# Altium PCB PCB2.PcbDoc (part 2 of 2)
Units mil, origin at the board's own origin, x right, y up, seen from the top; angles counter-clockwise.
Board outline 4285 x 3645 mil, 4 copper layers (Top Layer, Int1 (GND), Int2 (PWR), Bottom Layer), stack 53.912 mil thick; 114 components, 93 nets, 393 pads, 69 vias.
Unrouted connection lines stored in the file: 1.
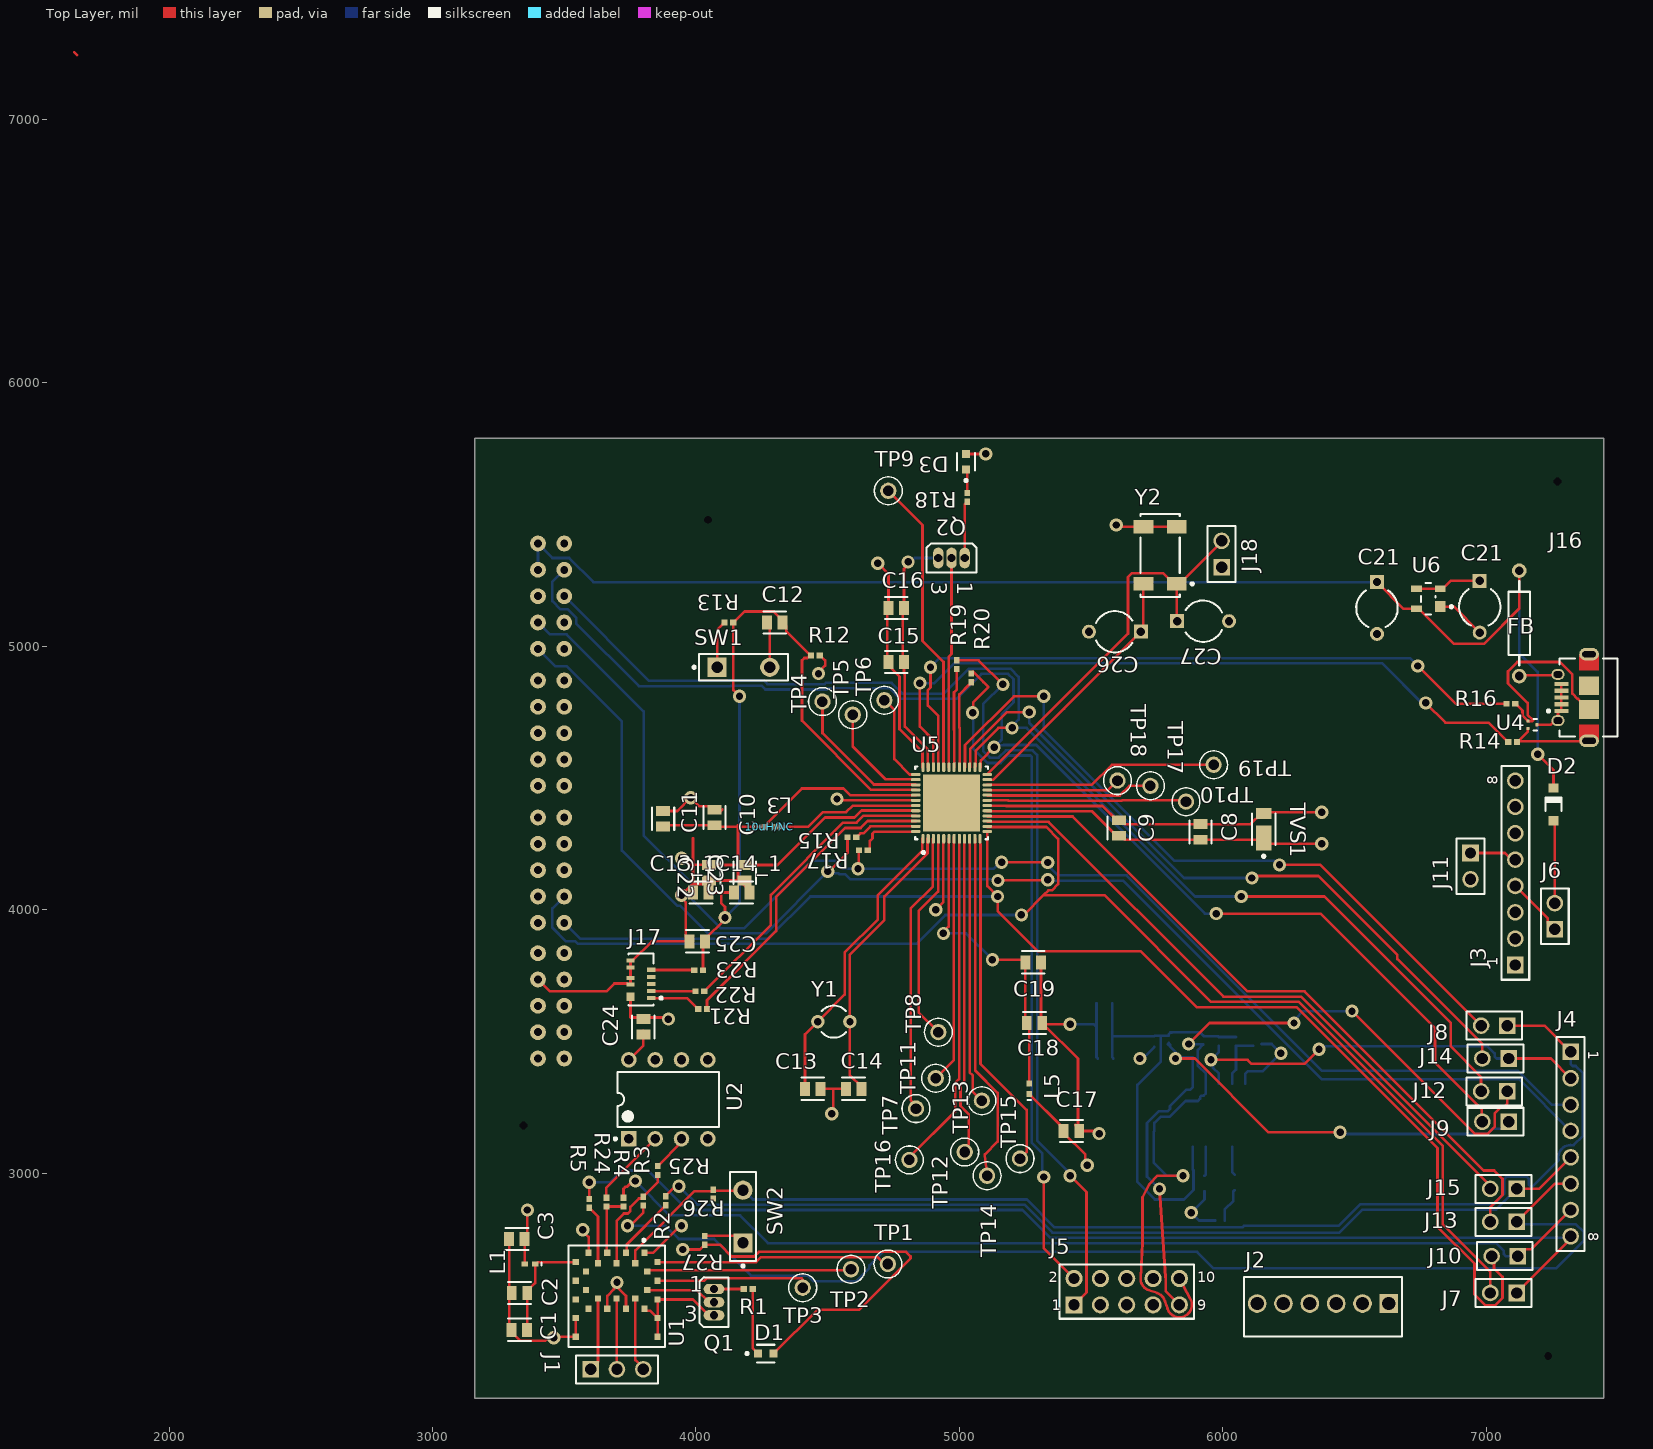
[diagram p0: Top Layer view]

## Via types
v1: diameter 50, hole 28, Top Layer to Bottom Layer, 69 vias

## Nets (pads, with @x,y where several pads share a name; then routed paths per layer and width w, separated by ;. In a path a pad name is that pad's centre, name@x,y a point inside that pad or via, vN(x,y) a via of type N, cw(c..) or ccw(c..) an arc to the next point about the centre after c; other vN are vias at no path point) (continued)
SCL: (continued)
  Top Layer w10: U5.26 5061.35,4543.59 5061.35,4602.92 5148.43,4690 v1(5200,4690) ; v1(6070,4050) 6385,4050 6865,3570 6865,3479.67 6980,3364.67 J12.2
  Bottom Layer w10: pad.19 3821.42,4868.58 4122.63,4868.58 4124.05,4870 4257.28,4870 4271.38,4855.91 4487.77,4855.91 4492.77,4860.91 4742.3,4860.91 4783.2,4820 4940.74,4820 5035.74,4915 5193.28,4915 5225,4883.28 5225,4721.57 5200,4696.57 v1(5200,4690) 5254.85,4690 5894.85,4050 6060,4050 v1@6070,4060
SDA: J9.2 pad.17 U5.25 | length 5033.8
  Top Layer w10: U5.25@5081.35,4540 5081.35,4566.35 v1(5131.72,4616.72) ; v1(5975,3985) 6370,3985 6805,3550 6805,3419.24 6982.75,3241.5 6982.75,3197.25 J9.2
  Bottom Layer w10: pad.17 3455,5245 3455,5171.36 3486.36,5140 3513.64,5140 3545,5108.64 3545,5086.72 3783.13,4848.58 4130.91,4848.58 4132.33,4850 4249,4850 4263.1,4835.91 4496.06,4835.91 4501.06,4840.91 4734.01,4840.91 4774.92,4800 4988.21,4800 5083.21,4895 5185,4895 5205,4875 5205,4786.2 5160,4741.2 5160,4645 v1@5139.37,4624.37 ; v1(5131.72,4616.72) v1@5139.37,4624.37 ; v1(5975,3985) 5931.57,3985 5291.57,4625 5168.28,4625 5167.65,4624.37 v1@5139.37,4624.37
SPICKS: U1.12
SPICS: U1.9
SPIMISO: R24.1 U2.2 | length 299.9
  Top Layer w10: R24.1 3660,2945 U2.2
SPIMOSI: R25.1 U2.3 | length 140.5
  Top Layer w10: R25.1 3855,3027.72 3945,3117.72 U2.3
SPISCK: U2.4
SWCLK: R22.1 U5.45 | length 1145.8
  Top Layer w10: R22.1 4032.72,3690 4038.54,3695.83 4038.54,3696.81 4283.94,3942.21 4283.94,4056.08 4557.86,4330 4610,4330 4636.62,4356.62 U5.45@4834.17,4356.62
SWDIO: R21.2 U5.46 | length 1183
  Top Layer w10: R21.2 4041.73,3656.15 4303.94,3918.36 4303.94,4047.79 4566.15,4310 4625,4310 4651.62,4336.62 U5.46@4834.17,4336.62
TX: J4.8 J7.1 R5.1 | length 4200.2
  Top Layer w10: R5.1 v1@3595,2950 ; J7.1 7320,2750 J4.8
  Bottom Layer w10: v1(3595,2965) 3673.7,2965 3718.7,3010 3818.43,3010 3968.43,2860 5239.35,2860 5345.18,2754.17 7314.17,2754.17 J4.8
UART1_CTS: J5.1 R19.1 | length 2910.9
  Top Layer w10: R19.1 5073.27,4946.73 v1(5165,4855) ; v1(5420,2990) 5482.48,2927.52 5482.48,2547.48 J5.1
  Bottom Layer w10: v1(5165,4855) 5090,4780 5090,4601.86 5115.15,4576.72 5148.28,4576.72 5176.57,4605 5277.43,4605 5295,4587.43 5295,3123.28 5420.76,2997.52 v1@5422.48,2997.52
UART1_RTS: J5.2 R20.1 | length 2639.9
  Top Layer w10: v1(5050,4747.65) 5052.65,4750.3 5052.65,4787.65 5110,4845 5090.61,4864.39 R20.1@5051.63,4903.37 ; v1(5320,2985) 5320,2715 J5.2
  Bottom Layer w10: v1(5050,4747.65) 5052.05,4745.6 5052.05,4611.53 5106.86,4556.72 5156.57,4556.72 5184.85,4585 5269.14,4585 5275,4579.14 5275,3115 5315,3075 v1@5315,2990
UART1_RX: J4.3 pad. R17.2 | length 5297.4
  Top Layer w10: v1(4615,4155) 4618.27,4158.27 R17.2 ; v1(5160,4180) 5160.39,4179.61 5334.61,4179.61 v1(5335,4179.22)
  Bottom Layer w10: pad. 3445,5045 3508.64,5045 3801.04,4752.6 3801.04,4282.4 3985,4098.43 3985,4038.43 4093.43,3930 4183.62,3930 4438.62,4185 4528.8,4185 4558.8,4155 v1(4615,4155) 5128.43,4155 5153.43,4180 v1(5160,4180) ; v1(5335,4179.22) 5335,4169.85 5374.85,4130 5635,4130 6376.5,3388.5 7119.78,3388.5 7248.28,3260 J4.3
UART1_TX: J4.4 pad.22 R15.2 | length 5335.1
  Top Layer w10: v1@4495,4135 4575,4215 R15.2 ; v1(5145.83,4110.74) 5147.1,4112.01 5333.73,4112.01 v1(5335,4113.28)
  Bottom Layer w10: pad.22 3465.46,4924.54 3509.1,4924.54 3718.77,4714.87 3718.77,4224.66 3928.43,4015 3940,4015 4045,3910 4265,3910 v1(4500,4145) 4506.49,4138.51 4540,4138.51 4543.51,4135 4566.2,4135 4586.2,4115 5141.57,4115 v1(5145.83,4110.74) ; v1(5335,4113.28) 5338.28,4110 5621.57,4110 6375.07,3356.5 7123.5,3356.5 J4.4
UART_CTS: J13.2 U5.16 | length 2708
  Top Layer w10: U5.16@5105.83,4353.58 5430,4353.58 6093.58,3690 6310,3690 6990,3010 7030,3010 7061.5,2978.5 7061.5,2917.55 7015,2871.05 J13.2
UART_RTS: J15.2 U5.15 | length 2494.2
  Top Layer w10: U5.15 5108.35,4333.58 5338.13,4333.58 6001.72,3670 6296.57,3670 7015,2951.57 J15.2
UART_RX: J7.2 pad.41 U5.14 | length 5178.3
  Top Layer w10: U5.14@5105.83,4313.58 5329.85,4313.58 5375,4268.43 5375,4096.72 5351.57,4073.28 5338.28,4073.28 5320,4055 ; v1(5235,3980) 5245,3980 5320,4055 ; J7.2 7015,2624.24 6834.83,2804.41 6834.83,3103.45 6288.28,3650 5955,3650 5550,4055 5320,4055
  Bottom Layer w10: pad.41 3455,4005 3455,3931.36 3506.36,3880 3541.72,3880 3551.72,3870 4836.57,3870 4946.57,3980 v1(5235,3980)
UART_TX: J10.2 pad.43 U5.13 | length 5018.6
  Top Layer w10: U5.13@5105.83,4293.58 5105.83,4089.17 v1(5145,4050) 5145,3995 5298.43,3841.57 5688.84,3841.57 5900.41,3630 6280,3630 6814.83,3095.17 6814.83,2796.13 6955,2655.96 6955,2539.24 6995.74,2498.5 7034.26,2498.5 7061.5,2525.74 7061.5,2606.03 7029.02,2638.5 7029.02,2675.98 J10.2
  Bottom Layer w10: pad.43 3560,3890 4273.85,3890 4433.85,4050 v1(5145,4050)
USB/DM: R16.1 U5.33 | length 2663.5
  Top Layer w10: v1(4890,4920) 4890,4843.26 4880,4833.26 4880,4775 4920,4735 U5.33@4920,4550 ; v1(6740,4925) 6883.27,4781.73 R16.1
  Bottom Layer w10: v1(4890,4920) 4925,4955 6710,4955 v1(6740,4925)
USB/DP: R14.1 U5.34 | length 2714.2
  Top Layer w10: v1(4850,4860) 4850,4695 4900,4645 U5.34@4900,4550 ; v1(6770,4785) 6845.05,4709.95 7009.06,4709.95 7082.28,4636.73 R14.1
  Bottom Layer w10: v1(4850,4860) 4905,4860 4980,4935 6605,4935 v1@6762.5,4777.5
VCC5V: C21.1@6585,5243.43 D2.2 FB.1 pad.16 pad.vcc U6.4 | length 5059.9
  Top Layer w10: C21.1@6585,5243.43 6686.22,5142.2 U6.4 6743.58,5142.2 6875.79,5010 6992.22,5010 7125,5142.78 FB.1 ; v1(7195,4590) 7255,4530 D2.2
  Bottom Layer w10: pad.16 pad.vcc 3455,5335 3518.64,5335 3610.21,5243.43 C21.1@6585,5243.43 ; FB.1 7125,4972.67 7195,4902.67 v1(7195,4590)
VDD3.3: C3.1 C8.1 C9.1 C15.1 C16.1 C17.2 C21.1@6975,5248.43 C22.1 C23.1 C24.1 D1.2 D3.2 J11.2 J17.10 L1.2 L2.2 L5.1 pad.15 pad.31 R12.2 R27.1 TVS1.1 U2.1 U2.5 U2.6 U2.7 U5.17 U5.36 U5.44 U6.2 U6.3 | length 6000.5
  Top Layer w10: L1.2 3350.31,2749.21 C3.1 3360,2760.47 v1(3360,2860) ; J17.10 3751.26,3590.79 3888.74,3590.79 v1(3895,3584.53) ; v1(3945,4195) 3951.57,4195 3976.57,4170 C22.1 4050.47,4169.53 C23.1 4309.53,4169.53 4490,4350 4601.72,4350 4628.33,4376.62 U5.44@4834.17,4376.62 ; v1(3950,2710) 4015,2710 4026.46,2721.46 4027.44,2721.46 4033.27,2727.28 R27.1 4090.95,2728.27 4135.64,2683.58 4220.9,2683.58 4238.22,2700.91 4797.28,2700.91 4814.05,2684.14 4814.05,2675.86 4619.05,2480.87 4460.39,2480.87 D1.2 ; v1(4465,4895.91) 4465,4901.57 4490,4926.57 4490,4945.98 4470.98,4965 R12.2 ; v1(4690,5315) 4730.47,5274.53 C16.1 ; C16.1@4725.47,5145 4725.47,4932.13 4772.6,4885 4772.6,4685 4860,4597.6 U5.36@4860,4540.83 ; D3.2 5089.53,5729.53 v1@5090,5730 ; U5.17@5105.83,4373.58 5504.02,4373.58 5597.13,4280.47 C9.1 5612.87,4280.47 5627.87,4265.47 C8.1 6148.94,4265.47 TVS1.1 6176.54,4250 v1(6375,4250) ; L5.1 5265,3298.35 5269.84,3293.5 5271.81,3293.5 5381.77,3183.54 5381.77,3181.57 5386.64,3176.71 C17.2@5388.6,3176.71 ; C17.2@5395,3160.47 C17.2 5395.47,3152.13 5477.6,3070 5477.6,3037.4 v1(5485,3030) ; U6.3 U6.2 6834.13,5217.8 6864.76,5248.43 C21.1@6975,5248.43
  Bottom Layer w10: v1(5685,3435) 5692.65,3442.65 5704.31,3442.65 5740,3478.35 L2.2
  other v1: 5100,5730
VSW: 10uH/NC.1 U5.43 | length 558.8
  Top Layer w10: 10uH/NC.1 4426.72,4315 4481.72,4370 4570.16,4370 4595.16,4395 U5.43@4825,4395
pads on no net: J2.1 J2.2 J2.3 J2.4 J2.5 J2.6 J3.1 J3.6 J3.7 J3.8 J5.3 J5.4 J5.5 J5.6 J5.8 J16.10 J17.3 J17.4 U1.10 U1.11 U1.13 U3.1 U3.7 U3.8 U3.9 U3.11 U3.14 U5.49
copper on no net: | length 14.1
  Top Layer w10: 1640.51,7254.06 1650.51,7244.06

## Polygon pours and split planes (outlines as drawn)
GND on Int1 (GND) (split plane): 7424.9,2165.1 3180.1,2165.1 3180.1,5769.9 7424.9,5769.9
VDD3.3 on Int2 (PWR) (split plane): 7424.9,2165.1 3180.1,2165.1 3180.1,5769.9 7424.9,5769.9

## Silkscreen, mask and mechanical layers (free items; w line width, h text height)
Bottom Overlay:
  lines w10: 3350,3370 3550,3370 3550,5450 3350,5450 3350,3370
  text "RaspberryPi" at 3629.99,4800 h60 r270

## Text inside footprints (layer, text, board x,y; h text height)
J3: Top Overlay "8" at 7043.07,4475.04 h40 r90; Top Overlay "1" at 7043.07,3785.28 h40 r90
J4: Top Overlay "8" at 7386.93,2774.96 h40 r270; Top Overlay "1" at 7386.93,3464.72 h40 r270
J5: Top Overlay "10" at 5903.11,2585.43 h40; Top Overlay "9" at 5903.11,2479.13 h40; Top Overlay "1" at 5351.14,2479.13 h40; Top Overlay "2" at 5339.33,2585.43 h40
J16: Mechanical 1 "PCB EDGE" at 7429.37,5029.69 h39.37 r90
Q1: Top Overlay "1" at 3975,2550 h59.05; Top Overlay "3" at 3955,2435 h59.05
Q2: Top Overlay "1" at 4991.85,5245.43 h59.05 r270; Top Overlay "3" at 4892.72,5245.43 h59.05 r270